# Altium PCB TeensyESC.PcbDoc (part 2 of 2)
Units mil, origin at the board's own origin, x right, y up, seen from the top; angles counter-clockwise.
Board outline 6000 x 4000 mil, 2 copper layers (Top Layer, Bottom Layer); 113 components, 117 nets, 556 pads, 0 vias.
Unrouted connection lines stored in the file: 293.
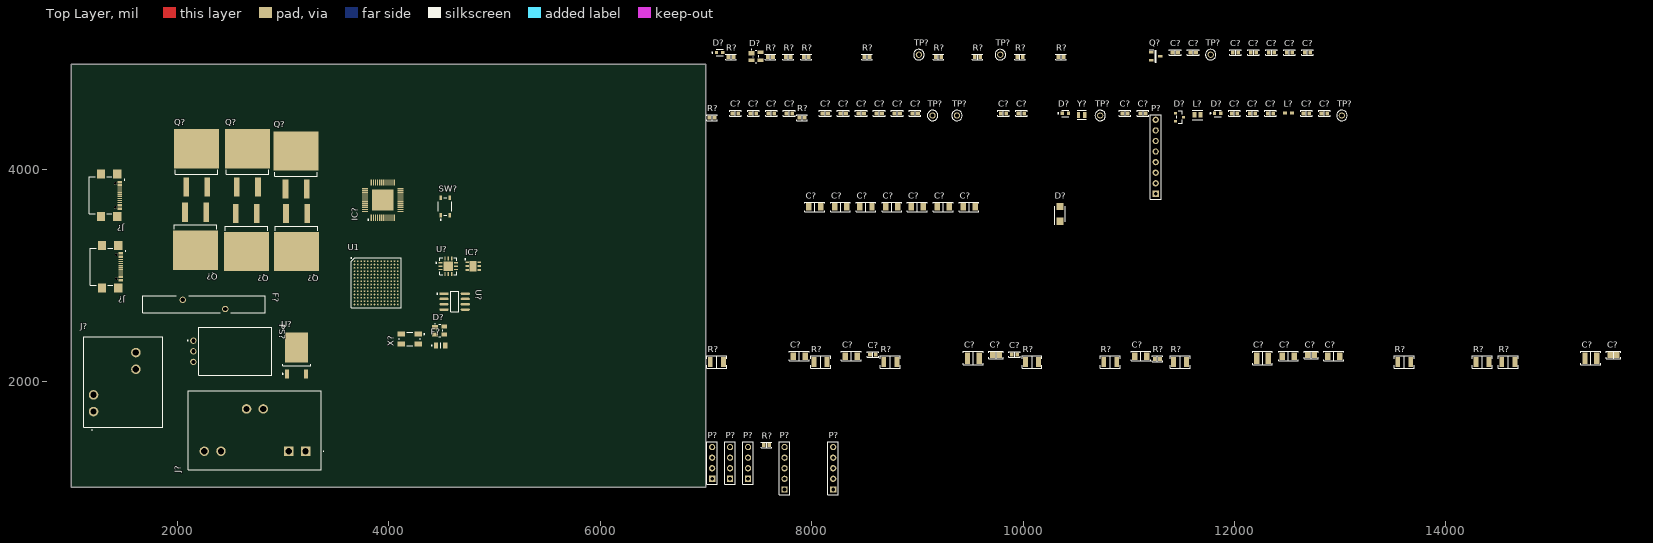
[diagram p0: Top Layer view]

## Part data (continued)
R? R?: library part RT0603DRE0756KL, "RES SMD 56K OHM 0.5% 1/10W 0603", Device Package="0603 (1608 Metric)", manufacturer=Yageo, Operating Temperature="-55°C ~ 155°C", Power (Watts)="0.1W, 1/10W", Supplier Device Package=0603, Supplier Part Number 1=311-2622-1-ND, Temperature Coefficient=±50ppm/°C, Tolerance=±0.5%, componentlink1description=Datasheet, componentlink1url=https://www.yageo.com/upload/media/product/productsearch/datasheet/rchip/PYu-RT_1-to-0.01_RoHS_L_11.pdf, componentlink2description="DigiKey Link", componentlink2url=https://www.digikey.com/en/products/detail/yageo/RT0603DRE0756KL/1074915, Composition="Thin Film", Height - Seated (Max)="0.022\" (0.55mm)", lastupdated="2/5/2023 8:27:54 PM", Lifecycle Status=Active, Minimum Order=1, Number of Terminations=2, Package / Case="0603 (1608 Metric)", packaging=TapeAndReel, Part Number=RT0603DRE0756KL, Part Status=Active, partid=9956, price=0.01, Resistance="56 kOhms", series=RT, Size / Dimension="0.063\" L x 0.031\" W (1.60mm x 0.80mm)", Supplier 1=DigiKey
R? R?: library part RMCF0603JG5K10, "RES 5.1K OHM 5% 1/10W 0603", Device Package="0603 (1608 Metric)", manufacturer="Stackpole Electronics Inc", Operating Temperature="-55°C ~ 155°C", Power (Watts)="0.1W, 1/10W", Ratings=AEC-Q200, Supplier Device Package=0603, Supplier Part Number 1=RMCF0603JG5K10CT-ND, Temperature Coefficient=±200ppm/°C, Tolerance=±5%, componentlink1description=Datasheet, componentlink1url=https://www.seielect.com/catalog/sei-packaging.pdf, componentlink2description="DigiKey Link", componentlink2url=https://www.digikey.com/en/products/detail/stackpole-electronics-inc/RMCF0603JG5K10/1712287, Composition="Thick Film", Features="Automotive AEC-Q200", Height - Seated (Max)="0.022\" (0.55mm)", lastupdated="2/5/2023 8:28:09 PM", Lifecycle Status=Active, Minimum Order=1, Number of Terminations=2, Package / Case="0603 (1608 Metric)", packaging=CutTape, Part Number=RMCF0603JG5K10, Part Status=Active, partid=5180, price=0.01, Resistance="5.1 kOhms", series=RMCF, Size / Dimension="0.061\" L x 0.031\" W (1.55mm x 0.80mm)", Supplier 1=DigiKey
R? R?: library part RMCF0603JT16K0, "RES 16K OHM 5% 1/10W 0603", Device Package="0603 (1608 Metric)", manufacturer="Stackpole Electronics Inc", Operating Temperature="-55°C ~ 155°C", Power (Watts)="0.1W, 1/10W", Ratings=AEC-Q200, Supplier Device Package=0603, Supplier Part Number 1=RMCF0603JT16K0CT-ND, Temperature Coefficient=±200ppm/°C, Tolerance=±5%, componentlink1description=Datasheet, componentlink1url=https://www.seielect.com/catalog/sei-rmcf_rmcp.pdf, componentlink2description="DigiKey Link", componentlink2url=https://www.digikey.com/en/products/detail/stackpole-electronics-inc/RMCF0603JT16K0/1757955, Composition="Thick Film", Features="Automotive AEC-Q200", Height - Seated (Max)="0.022\" (0.55mm)", lastupdated="2/5/2023 8:27:59 PM", Lifecycle Status=Active, Minimum Order=1, Number of Terminations=2, Package / Case="0603 (1608 Metric)", packaging=CutTape, Part Number=RMCF0603JT16K0, Part Status=Active, partid=8268, price=0.01, Resistance="16 kOhms", series=RMCF, Size / Dimension="0.061\" L x 0.031\" W (1.55mm x 0.80mm)", Supplier 1=DigiKey
R?: library part RCS06032M20JNEA, "RES SMD 2.2M OHM 5% 1/4W 0603", Device Package="0603 (1608 Metric)", manufacturer="Vishay Dale", Operating Temperature="-55°C ~ 155°C", Power (Watts)="0.25W, 1/4W", Ratings=AEC-Q200, Supplier Device Package=0603, Supplier Part Number 1=541-2824-1-ND, Temperature Coefficient=±200ppm/°C, Tolerance=±5%, componentlink1description=Datasheet, componentlink1url=http://www.vishay.com/docs/20065/rcse3.pdf, componentlink2description="DigiKey Link", componentlink2url=https://www.digikey.com/en/products/detail/vishay-dale/RCS06032M20JNEA/5866970, Composition="Thick Film", Features="Automotive AEC-Q200, Pulse Withstanding", Height - Seated (Max)="0.020\" (0.50mm)", lastupdated="2/5/2023 8:28:09 PM", Lifecycle Status=Active, Minimum Order=1, Number of Terminations=2, Package / Case="0603 (1608 Metric)", packaging=TapeAndReel, Part Number=RCS06032M20JNEA, Part Status=Active, partid=5440, price=0.02, Resistance="2.2 MOhms", series="RCS e3", Size / Dimension="0.061\" L x 0.033\" W (1.55mm x 0.85mm)", Supplier 1=DigiKey
SW?: library part CMP-10040-000011-1, "SWITCH TACTILE SPST-NO 0.05A 16V", Contact Resistance=500mΩ, Current Rating=50mA, manufacturer="C&K Components", Operating Force=400gf, Temperature="-40°C to +85°C", Temperature Range High=+85°C, Temperature Range Low=-40°C, Voltage Rating Dc=16V, Automotive=No, Category=Switch, componentlink2description=Datasheet, componentlink2url=https://www.ckswitches.com/media/1476/pts810.pdf, Device Class L1=Electromechanical, Device Class L2=Switches, Device Class L3="Tactile Switches", Digikey Description="SWITCH TACTILE SPST-NO 0.05A 16V", Electromechanical Life=100000Cycles, Height=2.7mm, Lead Free=Yes, Manufacturer Part Number="PTS810 SJG 250 SMTR LFS", Mouser Description="Switch Tactile N.O. SPST Button J-Bend 0.05A 16VDC 100000Cycles 3.92N SMD T/R", Octopart=https://octopart.com/pts810sjg250smtrlfs-c%26k+components-29380277, Package="PTS810 SJG 250 SMTR LFS", RoHS=TRUE, Throw Configuration=SPST-NO
TP? TP? TP? TP? TP? TP? TP?: library part CMP-002-00037-2, "Test Point, Orange, Height 4.6 mm, Tail Length 3 mm, 1-Pin THD, RoHS", Colour=Orange, manufacturer=Keystone, Package Description="1-Pin Through Hole Device, Dia 2.54 mm", Package Quantity=10, Case/Package=5003, Connector Type=TestPoint, Contact Material=Bronze, Contact Plating=Tin, Datasheet URL=http://keyelco.com/userAssets/file/M65p56.pdf, Datasheet Version=Jun-15, Diameter=2.54mm, Manufacturer URL=http://www.keyelco.com/, Mounting Technology=TH, Package Reference=5003, packaging=Bulk, Pins=1, RoHS Compliant=True
U1: "Integrated Circuit", Manufacturer_Name=NXP, Mouser Part Number=771-MIMXRT1062DVJ6B, Arrow Part Number=MIMXRT1062DVJ6B, Arrow Price/Stock=https://www.arrow.com/en/products/mimxrt1062dvj6b/nxp-semiconductors?region=nac, Datasheet Link=https://www.nxp.com/docs/en/nxp/data-sheets/IMXRT1060CEC.pdf, Height=1.52mm, Manufacturer_Part_Number=MIMXRT1062DVJ6B, Mouser Price/Stock=https://www.mouser.co.uk/ProductDetail/NXP-Semiconductors/MIMXRT1062DVJ6B?qs=BJlw7L4Cy7%252B08A9rbTO5WQ%3D%3D
U?: library part CMP-2000-04923-2, "IC TRANSCEIVER HALF 1/1 8SO", Case/Package=SO, Max Operating Temperature=150°C, Max Supply Current=10mA, Max Supply Voltage=5.25V, Min Operating Temperature=-40°C, Min Supply Voltage=4.75V, Package Quantity=2500, Contact Plating=Gold, Data Rate=1Mbps, Interface=CAN, Lead Free="Lead Free", Mount="Surface Mount", Nominal Supply Current=10mA, Number of Pins=8, Number of Receive Buffers=1, Number of Transceivers=1, Number of Transmit Buffers=1, packaging="Tape and Reel", Radiation Hardening=No, REACH SVHC="No SVHC", Receiver Hysteresis=70mV, Simplex/Duplex="Half Duplex"
U?: library part CMP-0062-00280-3, "1A Low Dropout CMOS Linear Regulators Stable with Ceramic Output Capacitors, 3-pin TO-252, Pb-Free", manufacturer="Texas Instruments", PackageTopMarking=NSUZXYTT*LP38690*DT-5.0, PowerWise=Y, Code_JEDEC=TO-252-AA, componentlink1description="Datasheet URL", componentlink1url=http://www.ti.com/general/docs/lit/getliterature.tsp?genericPartNumber=LP38690&fileType=pdf, CompType="LDO IC", PackageDescription="TO252, Molded, Jedec, 6.8 x 6.10 x 2.30mm Body, 3 Lead, 2.28mm Pitch, Surface Mount", PackageReference=NDP0003B, PinCount=3, RoHS=Y
U?: library part CMP-05714-000029-1, "IC INTERFACE SPECIALIZED 12TQFN", Max Operating Temperature=85°C, Max Output Current=4A, Max Supply Voltage=5.5V, Min Operating Temperature=-40°C, Min Supply Voltage=4V, Nominal Supply Current=3uA, On-State Resistance=26R, Package Quantity=75, Contact Plating=Tin, Interface=USB, Lead Free="Lead Free", Mount="Surface Mount", Number of Inputs=1, Number of Outputs=1, Number of Pins=12, packaging=Rail/Tube, Radiation Hardening=No, RoHS Compliant=Yes, series=-, Supply Current=3uA, Turn-Off Delay Time=3ms, Turn-On Delay Time=4ms
X?: library part CMP-003-00019-2, "Ceramic SMD Crystal, 24 MHz, +/- 20 ppm, 18 pF, -20 to 70 degC, 4-Pin SMD, RoHS, Tape and Reel", Case/Package=CSMD, Frequency=24MHz, Frequency Tolerance=20ppm, Load Capacitance=18pF, manufacturer=Abracon, Max Operating Temperature=70°C, Min Operating Temperature=-20°C, Package Description="4-Pin Surface Mount Device, Body 5 x 3.2 mm", Package Quantity=1000, Package Reference=ABM3B, Resistance=50Ohm, Datasheet URL=http://www.abracon.com/Resonators/abm3b.pdf, Datasheet Version=Aug-15, ESR=50, Manufacturer URL=http://www.abracon.com/, Mounting Technology=SM, packaging=TapeandReel, Pins=4, RoHS Compliant=True, Tolerance=20ppm
Y?: library part CMP-27762-003430-2, "Crystal 32.768kHz ±10ppm (Tol) 9pF FUND 90kΩ 2-Pin Mini-CSMD T/R", Case/Package=CSMD, ESR (Equivalent Series Resistance)=90kR, Frequency=32.768kHz, Frequency Tolerance=10ppm, Load Capacitance=9pF, Max Operating Temperature=85°C, Min Operating Temperature=-40°C, Package Quantity=3000, Depth=1.2mm, Height=0.6mm, Length=2mm, Mount="Surface Mount", Number of Pins=2, packaging="Tape and Reel", Radiation Hardening=No, REACH SVHC="No SVHC", RoHS Compliant=Yes, series=ABS06, Series Resistance=90kR, Termination=SMD/SMT, Tolerance=10ppm, Width=1.2mm

## Nets (pads, with @x,y where several pads share a name; then routed paths per layer and width w, separated by ;. In a path a pad name is that pad's centre, name@x,y a point inside that pad or via, vN(x,y) a via of type N, cw(c..) or ccw(c..) an arc to the next point about the centre after c; other vN are vias at no path point)
5VOUT: C?.2@7942.09,2240
12VOUT: C?.2@8432.09,2240 C?.2@8817.09,3650 C?.2@9057.09,3650 C?.2@9302.09,3650 IC?.29 P?.4@7060,1378.9 PS?.3 U?.3@3219.9,2070.67
+3V3: C?.1@8553.43,2255 C?.1@11583.43,5110 C?.2@8836.57,4535 C?.2@12206.57,5110 C?.2@12546.57,5110 C?.2@12716.57,5110 D?.1@11440.63,4537.4 D?.2@10429.53,4535 IC?.4@4857.09,3052.6 IC?.5@4857.09,3090 IC?.19 IC?.25 L?.2@12542.48,4540 P?.2@7060,1178.9 P?.2@7400,1178.9 P?.8 TP?.1@11775,5090 U1.E6 U1.E9 U1.F5 U1.F10 U1.J6 U1.J10 U1.K4 U1.K5 U1.N14 U1.P12
+5: C?.1@11983.43,5110 C?.1@12323.43,5110 C?.2@11466.57,5110 D?.1@10350,3516.1 D?.2@7159.53,5110 IC?.1@4742.91,3127.4 IC?.6@4857.09,3127.4 P?.3@7060,1278.9 Q?.2 R?.2@7265.59,5068.9 TP?.1@9785,5090 U1.N6 U1.P6 U?.3@4524.57,2730 U?.9 U?.12
+5_HOST: D?.2@7431.69,5037.6 J?.A4/B9@1457.32,3854.49 J?.B4/A9@1457.32,3665.51 R?.2@7635.59,5068.9 R?.2@7975.59,5068.9 U?.1@4492.56,3121.5 U?.10
+5_SUP: D?.2@4440,2445 F?.1@4449.01,2339.03 J?.A4/B9@1467.32,3179.49 J?.B4/A9@1467.32,2990.51
CU: C?.1@15314.88,2220
CV: C?.1@12209.88,2220 IC?.44
CW: C?.1@9474.88,2220 IC?.36
DCDC_PSWITCH: P?.1@11255,3773.9 R?.2@7935.59,4493.9 U1.G10 U1.K3
GND: C?.1@7253.43,4535 C?.1@7423.43,4535 C?.1@7593.43,4535 C?.1@7763.43,4535 C?.1@7827.91,2240 C?.1@7972.91,3650 C?.1@8103.43,4535 C?.1@8217.91,3650 C?.1@8273.43,4535 C?.1@8317.91,2240 C?.1@8443.43,4535 C?.1@8457.91,3650 C?.1@8613.43,4535 C?.1@8702.91,3650 C?.1@8783.43,4535 C?.1@8942.91,3650 C?.1@9187.91,3650 C?.1@9432.91,3650 C?.1@9713.5,2250 C?.1@9893.43,2255 C?.1@9958.43,4535 C?.1@10938.43,4535 C?.1@11108.43,4535 C?.1@11413.43,5110 C?.1@11973.43,4535 C?.1@12143.43,4535 C?.1@12153.43,5110 C?.1@12313.43,4535 C?.1@12493.43,5110 C?.1@12653.43,4535 C?.1@12663.43,5110 C?.1@12693.5,2250 C?.1@12823.43,4535 C?.1@15553.5,2250 C?.2@8606.57,2255 C?.2@9006.57,4535 C?.2@9841.57,4535 C?.2@11636.57,5110 C?.2@12036.57,5110 C?.2@12376.57,5110 C?.2@12997.09,2240 D?.1@4440,2511.93 D?.1@11810.47,4535 IC?.2@4742.91,3090 IC?.7@4800,3090 IC?.24 IC?.49 J?.3 J?.4 J?.A1/B12@1467.32,3210.98 J?.B1/A12@1467.32,2959.02 J?.S1@1444.68,3286.18 J?.S2@1444.68,2883.82 J?.S3@1289.96,3286.18 J?.S4@1289.96,2883.82 P?.1@7060,1078.9 P?.1@7230,1078.9 P?.1@7400,1078.9 P?.1@7745,978.9 P?.1@8205,978.9 P?.7 PS?.2 Q?.3@2765,3839.76 Q?.3@3030,3587.36 Q?.3@3225,3819.76 R?.1@7754.41,5068.9 R?.1@7884.41,4493.9 R?.1@9174.41,5068.9 R?.1@10334.41,5068.9 R?.2@7085.59,4493.9 R?.2@8550.59,5068.9 R?.2@9595.59,5068.9 R?.2@9995.59,5068.9 SW?.2 U1.A1 U1.A14 U1.B5 U1.B10 U1.E2 U1.E13 U1.G7 U1.G8 U1.G14 U1.H7 U1.H8 U1.J7 U1.J8 U1.K2 U1.K9 U1.K13 U1.L9 U1.N1 U1.N2 U1.N5 U1.N8 U1.P1 U1.P14 U?.2@4524.57,2780 U?.3@4492.56,3058.5 U?.4@3130.14,2318.7 U?.6@4596.5,3017.56 U?.8@4725.43,2830 U?.13 X?.2 X?.4
HOST_D+: D?.4@7518.31,5112.4 J?.A6@1457.32,3769.84 J?.B6@1457.32,3730.47 U1.N7
HOST_D-: D?.3@7518.31,5037.6 J?.A7@1457.32,3750.16 J?.B7@1457.32,3789.53 U1.P7
HSU: IC?.48
HSV: IC?.43 R?.1@11422.99,2183.9
HSW: IC?.37 R?.1@8682.99,2183.9
LSU: R?.1@13542.99,2183.9
LSV: R?.1@10022.99,2183.9
LSW: R?.1@7042.99,2183.9
NetC?_1: C?.1@12882.91,2240 C?.2@8087.09,3650 C?.2@8332.09,3650 C?.2@8572.09,3650 C?.2@9776.5,2250 C?.2@12567.09,2240 C?.2@12756.5,2250 C?.2@15616.5,2250 F?.2@2455,2685 IC?.33 PS?.1 Q?.4@2175,3240 Q?.4@2185,4200 Q?.4@2655,3227.13
NetC?_2: C?.2@8156.57,4535 C?.2@8326.57,4535 TP?.1@9375,4515 U1.P8
NetD?_1: D?.1@7431.69,5104.53 J?.A1/B12@1457.32,3885.98 J?.B1/A12@1457.32,3634.02 J?.S1@1434.68,3961.18 J?.S2@1434.68,3558.82 J?.S3@1279.96,3961.18 J?.S4@1279.96,3558.82
NetD?_2: D?.2@11869.53,4535
NetD?_3: D?.3@11519.37,4500 U1.M9
NetF?_1: F?.1@2053.43,2771.61 J?.1 J?.2
NetF?_2: F?.2@4535.62,2339.03 Q?.3@11296.34,5075
NetIC?_4: IC?.4@3895.79,3548.15 U1.F11
NetIC?_5: P?.6 U1.E14
NetIC?_6: P?.3@11255,3973.9 U1.G13
NetIC?_7: P?.4@11255,4073.9 U1.F14
NetIC?_8: IC?.8 P?.2@11255,3873.9 U1.F12
NetIC?_9: U1.L11
NetIC?_10: IC?.10 SW?.4
NetIC?_11: IC?.11 U1.K10
NetIC?_12: IC?.12 U1.D10
NetIC?_13: IC?.13 P?.5@11255,4173.9 U1.F13
NetIC?_14: IC?.14 U1.D8
NetIC?_15: IC?.15 U1.F3
NetIC?_16: IC?.16 U1.E7
NetIC?_17: IC?.17 U1.H3
NetIC?_18: IC?.18 U1.F2
NetIC?_20: IC?.20 U1.D9
NetIC?_21: IC?.21 U1.G5
NetIC?_22: IC?.22 U1.B11
NetIC?_23: IC?.23 U1.H5
NetIC?_26: IC?.26 U1.C5
NetIC?_27: IC?.27 U1.D5
NetJ?_A1: J?.A1 J?.B1 R?.2@10887.01,2183.9
NetJ?_A2: J?.A2 J?.B2 R?.2@14407.01,2183.9
NetJ?_A3: J?.A3 J?.B3 R?.2@8147.01,2183.9 R?.2@14652.01,2183.9
NetJ?_A5: J?.A5@1467.32,3134.21 R?.2@10385.59,5068.9
NetJ?_B5: J?.B5@1457.32,3691.1 R?.1@7584.41,5068.9
NetL?_1: L?.1@11621.41,4520 U1.M1 U1.M2
NetP?_2: P?.2@7230,1178.9
NetP?_3: P?.3@8205,1178.9 U1.M11
NetP?_4: P?.4@8205,1278.9 U1.G12
NetP?_5: P?.5@8205,1378.9 U1.J14
NetQ?_1: Q?.1@11213.66,5112.8 R?.1@9544.41,5068.9
NetR?_1: R?.1@7214.41,5068.9 U?.5@4565,3017.56
NetR?_2: R?.2@7805.59,5068.9 U1.A7 U?.4@4533.5,3017.56
NetU1_A2: U1.A2
NetU1_A10: U1.A10
NetU1_A11: U1.A11
NetU1_B3: U1.B3
NetU1_C3: U1.C3
NetU1_C10: U1.C10
NetU1_C11: U1.C11
NetU1_D1: U1.D1
NetU1_D2: U1.D2
NetU1_D3: U1.D3
NetU1_D11: U1.D11
NetU1_D13: U1.D13
NetU1_D14: U1.D14
NetU1_E1: U1.E1
NetU1_E4: U1.E4
NetU1_F1: U1.F1
NetU1_H2: U1.H2
NetU1_H4: U1.H4
NetU1_H11: U1.H11
NetU1_H12: U1.H12
NetU1_H13: U1.H13 U?.1@4524.57,2830
NetU1_J1: U1.J1
NetU1_J2: U1.J2
NetU1_J3: U1.J3
NetU1_J4: U1.J4
NetU1_J12: U1.J12
NetU1_J13: U1.J13
NetU1_K1: U1.K1
NetU1_K12: U1.K12
NetU1_K14: U1.K14
NetU1_L6: U1.L6
NetU1_L12: U1.L12
NetU1_L13: U1.L13
NetU1_L14: U1.L14
NetU1_M6: U1.M6
NetU1_M13: U1.M13 U?.4@4524.57,2680
OUT_D+: D?.4@4526.61,2519.8 J?.A6@1467.32,3094.84 J?.B6@1467.32,3055.47 U1.L8
OUT_D-: D?.3@4526.61,2445 J?.A7@1467.32,3075.16 J?.B7@1467.32,3114.53 U1.M8
PMIC_ON_REQ_PWR_SEQ: IC?.3@4742.91,3052.6 R?.2@9225.59,5068.9 TP?.1@9015,5090
POR_B: IC?.9 U1.M7
RTC_XTAL0: C?.2@11161.57,4535 U1.P9 Y?.1
RTC_XTAL1: C?.2@10011.57,4535 U1.N9 Y?.2
SOC_CAP_NET: C?.2@7306.57,4535 C?.2@7476.57,4535 C?.2@7646.57,4535 C?.2@7816.57,4535 L?.2@11678.59,4520 U1.F6 U1.F7 U1.F8 U1.F9 U1.G6 U1.G9 U1.H6 U1.H9 U1.J5 U1.J9
SPI_FLASH_CLK: IC?.6@3935.16,3548.15 U1.L4
SPI_FLASH_CS: IC?.1@3836.73,3548.15 U1.L3
SPI_FLASH_D0: IC?.5@3915.47,3548.15 U1.P3
SPI_FLASH_D1: IC?.2@3856.42,3548.15 U1.N4
SPI_FLASH_D2: IC?.3@3876.1,3548.15 U1.P4
SPI_FLASH_D3: IC?.7@3954.84,3548.15 U1.P5
U: C?.2@15425.12,2220 IC?.47 Q?.3@2075,3600.24 Q?.4@3125,4180
USENSE: IC?.46 R?.1@14282.99,2183.9
V: C?.2@12320.12,2220 IC?.42 Q?.3@2555,3587.36 Q?.4@2665,4200
VSENSE: IC?.41 R?.1@10762.99,2183.9
W: C?.2@9585.12,2220 IC?.38 Q?.3@2285,3839.76 Q?.4@3130,3227.13 R?.1@14527.99,2183.9
WSENSE: IC?.39 R?.1@8022.99,2183.9
XTAL0: C?.1@9788.43,4535 U1.N11 X?.3
XTAL1: C?.1@8953.43,4535 R?.1@7034.41,4493.9 U1.P11 X?.1
pads on no net: C?.1@11057.91,2240 C?.1@12452.91,2240 C?.2@8496.57,4535 C?.2@8666.57,4535 C?.2@9547.09,3650 C?.2@9946.57,2255 C?.2@10991.57,4535 C?.2@11172.09,2240 C?.2@12026.57,4535 C?.2@12196.57,4535 C?.2@12366.57,4535 C?.2@12706.57,4535 C?.2@12876.57,4535 D?.1@7100.47,5110 D?.1@10370.47,4535 D?.2@10350,3653.9 D?.2@11440.63,4462.6 IC?.28 IC?.30 IC?.31 IC?.32 IC?.34 IC?.35 IC?.40 IC?.45 J?. J?.A5@1457.32,3809.21 J?.A8 J?.B5@1467.32,3016.1 J?.B8 L?.1@12477.52,4540 P?.2@7745,1078.9 P?.2@8205,1078.9 P?.3@7230,1278.9 P?.3@7400,1278.9 P?.3@7745,1178.9 P?.4@7230,1378.9 P?.4@7400,1378.9 P?.4@7745,1278.9 P?.5@7745,1378.9 Q?.1@2085,3839.76 Q?.1@2275,3600.24 Q?.1@2565,3839.76 Q?.1@2755,3587.36 Q?.1@3025,3819.76 Q?.1@3230,3587.36 R?.1@7549.41,1398.9 R?.1@7924.41,5068.9 R?.1@8499.41,5068.9 R?.1@9944.41,5068.9 R?.1@11244.41,2213.9 R?.2@7167.01,2183.9 R?.2@7600.59,1398.9 R?.2@8807.01,2183.9 R?.2@10147.01,2183.9 R?.2@11295.59,2213.9 R?.2@11547.01,2183.9 R?.2@13667.01,2183.9 SW?.1 SW?.3 TP?.1@9145,4515 TP?.1@10730,4515 TP?.1@13015,4515 U1.A3 U1.A4 U1.A5 U1.A6 U1.A8 U1.A9 U1.A12 U1.A13 U1.B1 U1.B2 U1.B4 U1.B6 U1.B7 U1.B8 U1.B9 U1.B12 U1.B13 U1.B14 U1.C1 U1.C2 U1.C4 U1.C6 U1.C7 U1.C8 U1.C9 U1.C12 U1.C13 U1.C14 U1.D4 U1.D6 U1.D7 U1.D12 U1.E3 U1.E5 U1.E8 U1.E10 U1.E11 U1.E12 U1.F4 U1.G1 U1.G2 U1.G3 U1.G4 U1.G11 U1.H1 U1.H10 U1.H14 U1.J11 U1.K6 U1.K7 U1.K8 U1.K11 U1.L1 U1.L2 U1.L5 U1.L7 U1.L10 U1.M3 U1.M4 U1.M5 U1.M10 U1.M12 U1.M14 U1.N3 U1.N10 U1.N12 U1.N13 U1.P2 U1.P10 U1.P13 U?.1@3040.37,2070.67 U?.2@4492.56,3090 U?.5@4725.43,2680 U?.6@4725.43,2730 U?.7 U?.8@4637.44,3090 U?.11

## Text inside footprints (layer, text, board x,y; h text height)
L?: Mechanical 6 "Land Pattern Adapted for Flow Soldering" at 12470.63,4563.62 h1.97